# EAGLE board esp32-driver (tugas nanang) (EAGLE 7.5.0)
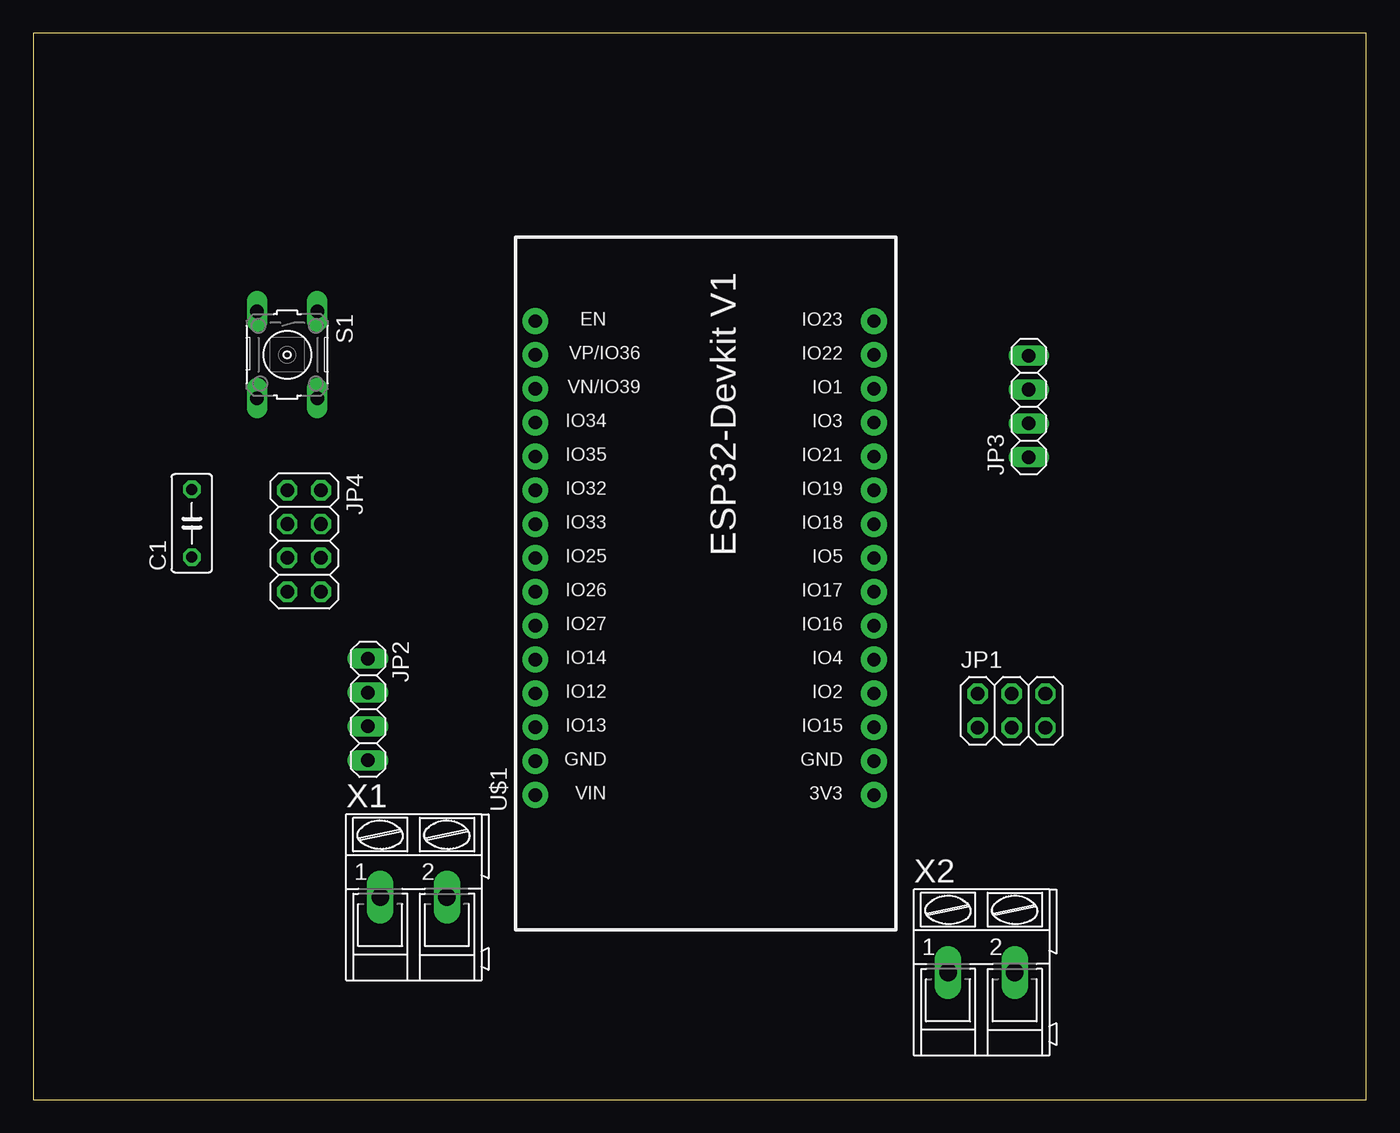
[diagram p0: board, top side]
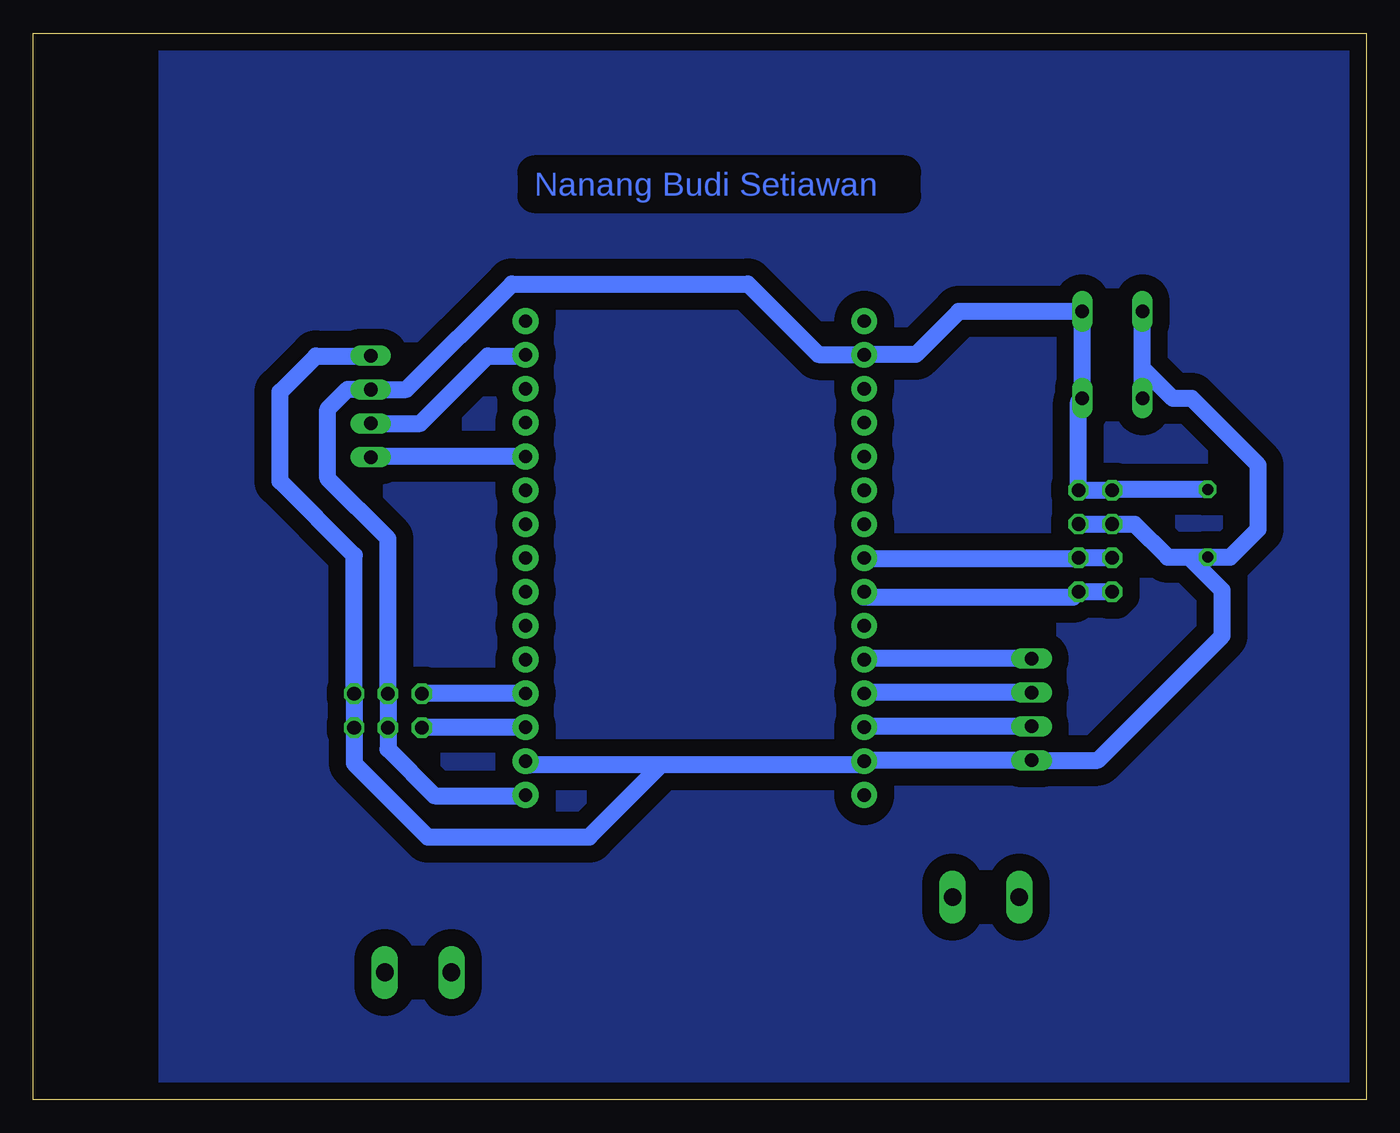
[diagram p1: board, bottom side, seen from below]

Size 100 x 80 mm. Coordinates in mm from the lower left corner, seen from the top.
Outline: 0,0 100,0 100,80 0,80 0,0
Copper layers (1*16): Top 0.035mm / dielectric 1.5mm / Bottom 0.035mm
Design rules "default": minimum track width 10mil, minimum drill 24mil, track to track 8mil, track to pad 8mil, pad to pad 8mil, via to via 8mil, smd to smd 8mil, copper to edge 40mil, drill to drill 8mil, minimum pad ring 10mil, minimum via ring 8mil, stop-mask expansion 4mil, vias tented up to drill 0mil, thermal gap 10mil

## Footprints (pad centres in the part's own frame; a part is rotated, then mirrored left to right if it is on the bottom)
C050-030X075 = drill 0.813 octagon: 1 -2.54,0; 2 2.54,0
2X03 = drill 1.016 octagon: 1 -2.54,-1.27; 2 -2.54,1.27; 3 0,-1.27; 4 0,1.27; 5 2.54,-1.27; 6 2.54,1.27
1X04 = drill 1.016 long: 1 -3.81,0; 2 -1.27,0; 3 1.27,0; 4 3.81,0
2X04 = drill 1.016 octagon: 1 -3.81,-1.27; 2 -3.81,1.27; 3 -1.27,-1.27; 4 -1.27,1.27; 5 1.27,-1.27; 6 1.27,1.27; 7 3.81,-1.27; 8 3.81,1.27
B3F-10XX = drill 1.016 long: 1 -3.251,2.261; 2 3.251,2.261; 3 -3.251,-2.261; 4 3.251,-2.261
ESP32-DEVKITV1 = drill 1 pad 1.93: 3V3 -16.52,-12.27; D1 13.96,-12.27; D2 -8.9,-12.27; D3 11.42,-12.27; D4 -6.36,-12.27; D5 1.26,-12.27; D12 -8.9,13.135; D13 -11.44,13.135; D14 -6.36,13.135; D15 -11.44,-12.27; D16 -3.82,-12.27; D17 -1.28,-12.27; D18 3.8,-12.27; D19 6.34,-12.27; D21 8.88,-12.27; D22 16.5,-12.27; D23 19.04,-12.27; D25 1.26,13.135; D26 -1.28,13.135; D27 -3.82,13.135; D32 6.34,13.135; D33 3.8,13.135; D34 11.42,13.135; D35 8.88,13.135; D36 16.5,13.135; D39 13.96,13.135; EN 19.04,13.135; GND@1 -13.98,13.135; GND@2 -13.98,-12.27; VIN -16.52,13.135
AK300/2 = drill 1.321 long: 1 -2.515,0; 2 2.489,0

## Placement (x,y rotation side)
C1  [C050-030X075]  11.89,43.24 90 top
JP1  [2X03]  73.39,29.18 0 top
JP2  [1X04]  25.11,29.27 270 top
JP3  [1X04]  74.69,52 90 top
JP4  [2X04]  20.32,41.91 270 top
S1  [B3F-10XX]  19.05,55.88 270 top
U$1  ESP32DEVKITV1  [ESP32-DEVKITV1]  50.8,39.37 90 top
X1  [AK300/2]  28.55,15.18 0 top
X2  [AK300/2]  71.15,9.54 0 top

## Library data of the parts
C1 = rcl; SPICEPREFIX: C
JP1-JP4 = pinhead
S1 = switch-omron; MPN: B3F-1000; OC_FARNELL: 176432; OC_NEWARK: 36M3542
U$1 = esp32-devkitv1
X1 X2 = con-ptr500; OC_FARNELL: unknown; OC_NEWARK: unknown

## Nets
GND: C1.1 JP1.5 JP1.6 JP2.4 JP3.4 JP4.3 JP4.4 S1.3 S1.4 U$1.GND@1 U$1.GND@2
MOISTURE: JP1.2 U$1.D2
OUT1: JP2.1 U$1.D14
OUT2: JP2.2 U$1.D12
OUT3: JP2.3 U$1.D13
PH: JP1.1 U$1.D15
SCL: JP3.2 U$1.D22
SCL2: JP4.5 JP4.6 U$1.D25
SDA: JP3.1 U$1.D21
SDA2: JP4.7 JP4.8 U$1.D26
V: C1.2 JP1.3 JP1.4 JP3.3 JP4.1 JP4.2 S1.1 S1.2 U$1.3V3 U$1.D36
VIN: U$1.VIN

## Tracks (layer width: path | path; a pad name or v marks a point on that pad's centre or on a via)
GND
  Bottom 1.27: JP4.4 JP4.3 17.38,43.18 14.9,40.7 13.3,40.7 | 13.3,40.7 C1.1 10.2,40.7 8.1,42.8 8.1,47.6 13.1,52.6 14.49,52.6 16.79,54.9 | S1.4 16.79,54.9 | 16.79,54.9 S1.3 | 13.3,40.7 10.8,38.2 10.8,34.8 20.14,25.46 JP2.4 37.59,25.46 U$1.GND@1 37.66,25.14 37.7,25.1 52.9,25.1 | JP3.4 78.8,55.8 81.5,53.1 81.5,46.4 75.93,40.83 JP1.6 JP1.5 75.93,25.23 70.4,19.7 58.3,19.7 52.9,25.1 | 52.9,25.1 62.78,25.1 U$1.GND@2
MOISTURE
  Bottom 1.27: U$1.D2 70.83,30.47 JP1.2
N$1
  pour Bottom (isolate 1.27): 0,80 90,80 90,0 0,0
OUT1
  Bottom 1.27: JP2.1 37.59,33.08 U$1.D14
OUT2
  Bottom 1.27: JP2.2 37.59,30.54 U$1.D12
OUT3
  Bottom 1.27: JP2.3 37.59,28 U$1.D13
PH
  Bottom 1.27: U$1.D15 70.83,27.93 JP1.1
SCL
  Bottom 1.27: JP3.2 70.97,50.73 65.9,55.8 63.14,55.8 U$1.D22
SCL2
  Bottom 1.27: JP4.5 JP4.6 21.63,40.6 37.4,40.6 37.43,40.63 U$1.D25
SDA
  Bottom 1.27: U$1.D21 74.69,48.25 JP3.1
SDA2
  Bottom 1.27: JP4.7 JP4.8 21.99,37.7 37.7,37.7 37.66,37.73 U$1.D26
V
  Bottom 1.27: C1.2 18.99,45.78 JP4.1 JP4.2 21.59,52.35 S1.2 S1.1 30.57,59.13 33.8,55.9 37.63,55.9 U$1.D36 37.7,55.9 41.1,55.9 46.4,61.2 64.1,61.2 72.03,53.27 JP3.3 74.72,53.3 76.4,53.3 77.9,51.8 77.9,46.6 73.39,42.09 JP1.4 JP1.3 73.39,26.29 69.9,22.8 63.12,22.8 U$1.3V3

## Text on the board
Bottom: Nanang Budi Setiawan